# Altium PCB LCRBoard.PcbDoc
Units mm, origin at the board's own origin, x right, y up, seen from the top; angles counter-clockwise.
Board outline 100.33 x 33.02 mm, 2 copper layers (Top Layer, Bottom Layer); 32 components, 30 nets, 144 pads, 5 vias.
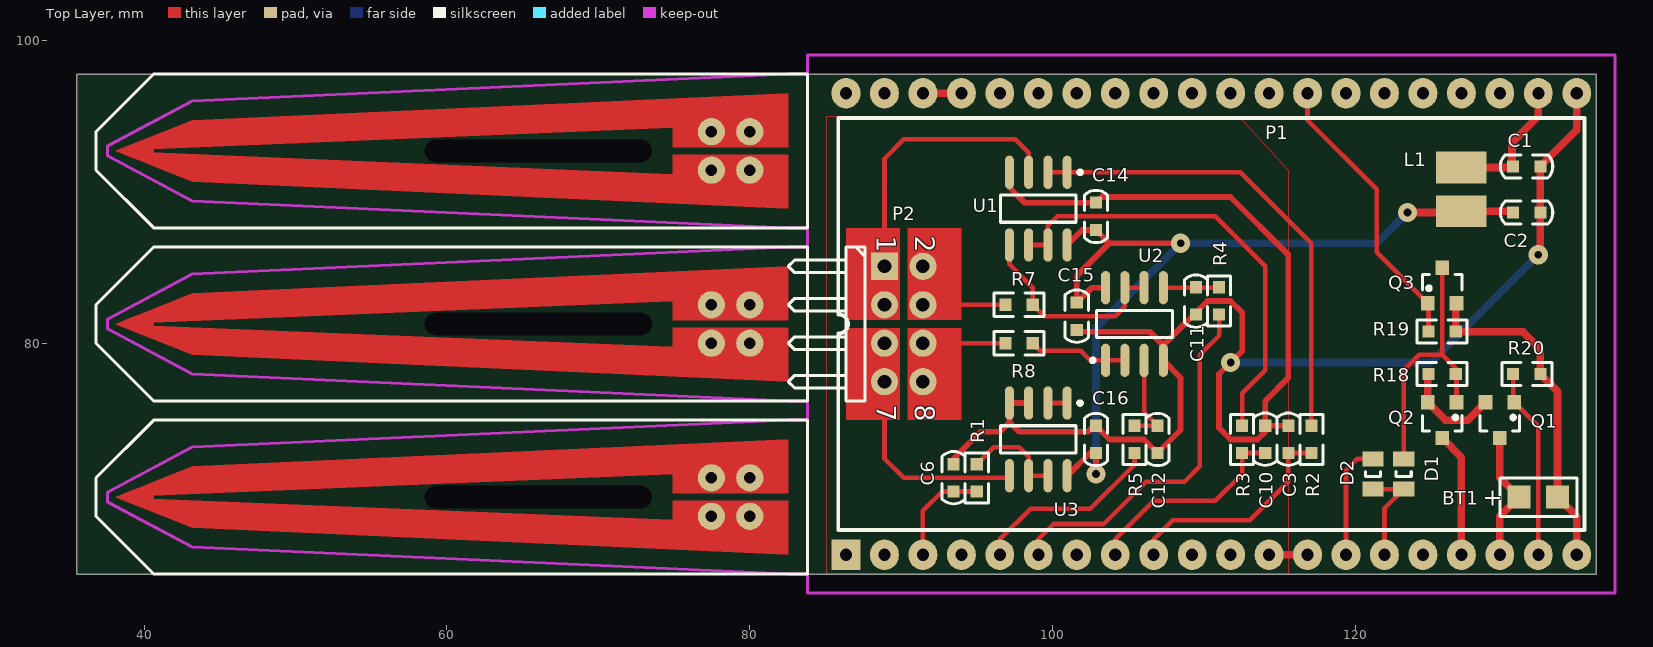
[diagram p0: Top Layer view]
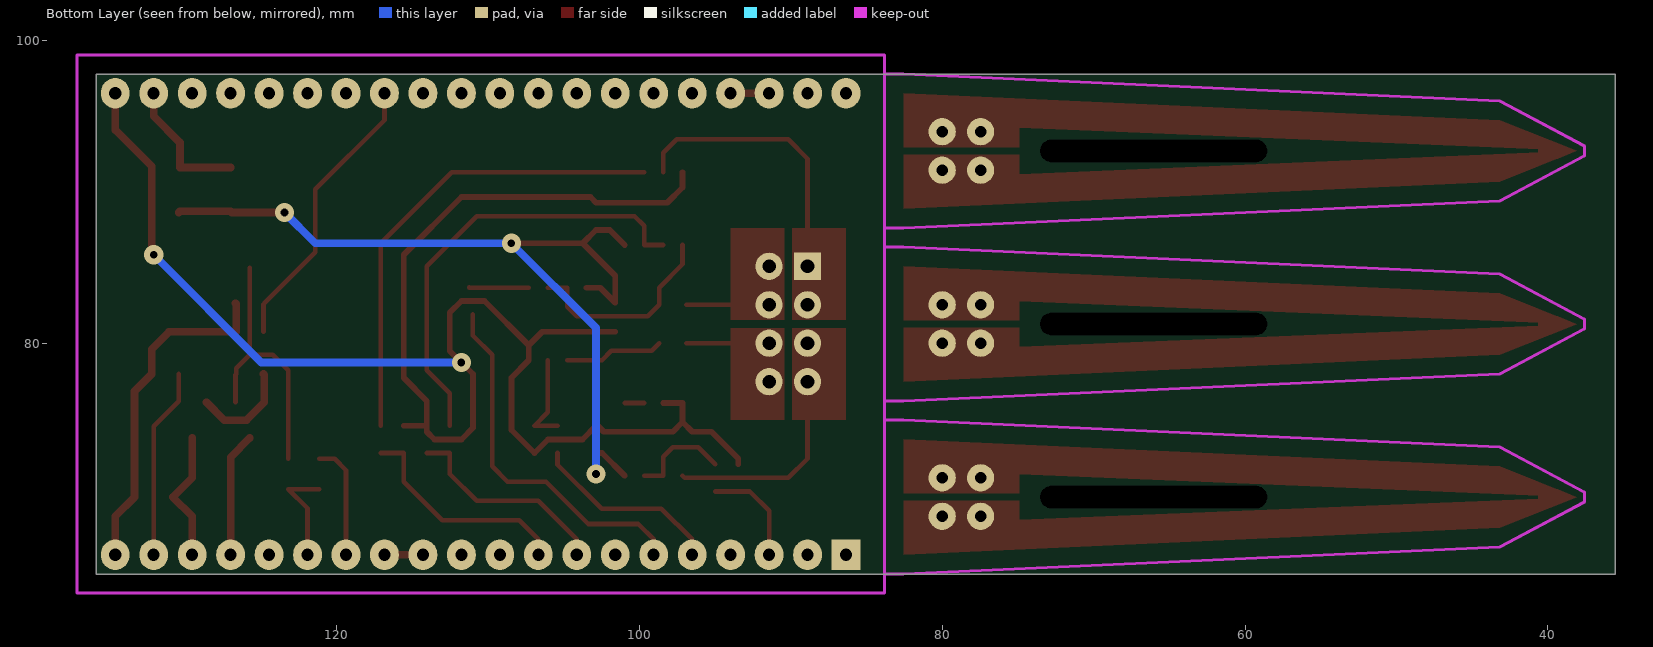
[diagram p1: Bottom Layer view, seen from below]

## Layer stack, top to bottom
Top Layer: signal copper 0.0356
Dielectric: dielectric 0.32, FR-4, Dk 4.8
Bottom Layer: signal copper 0.0356

## Board outline
35.56,64.77 135.89,64.77 135.89,97.79 35.56,97.79

## Design rules (kind name [scope] priority, off if disabled: settings)
Clearance Clearance_Polygon [InNamedPolygon('T-GND')] p1: gap=0.381
Clearance [All] p2: gap=0.254
ComponentClearance [All] p1 off: gap=0.254 collisioncheckmode=3 verticalgap=0.254 showdistances=FALSE
MinimumSolderMaskSliver [All] p1: minsoldermaskwidth=0.203
PolygonConnect PolygonConnect_Via [IsVia] p1: connectstyle=Direct reliefconductorwidth=0.254 reliefentries=4 polygonreliefangle="90 Angle"
PolygonConnect [All] p2: connectstyle=Relief reliefconductorwidth=0.254 reliefentries=4 polygonreliefangle="90 Angle"
RoutingVias [All] p1: holewidth=0.61 width=1.219 viastyle="Through Hole" minholewidth=0.305 minwidth=0.61 maxholewidth=0.457 maxwidth=0.914
SilkscreenOverComponentPads [All] p1: minsilkscreentomaskgap=0.203
SolderMaskExpansion [All] p1: expansion=0.102
Width [All] p1: maxlimit=1.016 minlimit=0.203 preferedwidth=0.305
25 further rules are at their usual default settings.

## Classes and differential pairs
component class LCRBoard: BT1 C1 C2 C3 C6 C10 C11 C12 C14 C15 C16 L1 P1 P2 Q1 Q2 Q3 R1 R2 R3 R4 R5 R7 R8 R18 R19 R20 U1 U2 U3

## Components (designator, comment, footprint, x,y, rotation, side; value= is the part's Value field where it differs from the comment)
BT1 "Battery" BAT-2 132.08,69.85 r0 top
C1 "Cap" 0603C 131.318,91.694 r180 top
C2 "Cap" 0603C 131.318,88.646 r180 top
C3 "Cap" 0603C 115.57,73.66 r90 top
C6 "Cap" 0603C 93.472,71.12 r90 top
C10 "Cap" 0603C 114.046,73.66 r90 top
C11 "Cap" 0603C 109.474,82.804 r270 top
C12 "Cap" 0603C 106.934,73.66 r270 top
C14 "Cap" 0603C 102.87,88.392 r270 top
C15 "Cap" 0603C 101.6,81.788 r90 top
C16 "Cap" 0603C 102.87,73.66 r270 top
D1 "SS14" 0805D 123.19,71.374 r270 top
D2 "SS14" 0805D 121.158,71.374 r270 top
L1 "CD32" CD32 127,90.17 r270 top
P1 "MiCore" MICORE 86.36,66.04 r90 top locked
P2 "Header 4X2H" HDR2X4H 88.9,85.09 r270 top locked
Q1 "AO3401" SOT-23 129.54,74.93 r180 top
Q2 "AO3401" SOT-23 125.73,74.93 r180 top
Q3 "AO3400" SOT-23 125.73,83.82 r0 top
R1 "Res3" 0603R 94.996,71.12 r90 top
R2 "Res3" 0603R 117.094,73.66 r90 top
R3 "Res3" 0603R 112.522,73.66 r90 top
R4 "Res3" 0603R 110.998,82.804 r90 top
R5 "Res3" 0603R 105.41,73.66 r90 top
R7 "Res3" 0603R 97.79,82.55 r180 top
R8 "Res3" 0603R 97.79,80.01 r180 top
R18 "Res3" 0603R 125.73,77.978 r180 top
R19 "Res3" 0603R 125.73,80.772 r180 top
R20 "Res3" 0603R 131.318,77.978 r180 top
U1 "MCP6002-I/SN" SOIC-SN8_N 99.06,88.9 r270 top
U2 "MCP6002-I/SN" SOIC-SN8_N 105.41,81.28 r90 top
U3 "MCP6002-I/SN" SOIC-SN8_N 99.06,73.66 r270 top

## Footprints (in the part's own frame and the unit in brackets; to place one, negate y for a bottom-side part, rotate by r counter-clockwise, add the part's x,y. Pads: shape width x height; smd on the part's side, far side on the other; paste and mask are expansions set on the pad)
0603C [mm] "ÌùÆ¬µ"
  rect 0.8x0.8 smd: 1(-0.9,0) 2(0.9,0)
  silkscreen extent -1.72,-0.76 1.74,0.76, body extent -0.9,-0.4 0.9,0.4, height 0.8
0603R [mm] "ÌùÆ¬µ"
  rect 0.8x0.8 smd: 1(-0.9,0) 2(0.9,0)
  silkscreen extent -1.65,-0.76 1.65,0.76, body extent -0.9,-0.4 0.9,0.4, height 0.45
0805D [mm] "贴片二极管(SOD-"
  rect 1x1.4 smd: 1(-1,0) 2(1,0)
  silkscreen extent -0.18,-0.5 0.15,0.5, body extent -1.07,-0.7 1.07,0.7, height 1
BAT-2 [mm] "Battery; 2 Leads"
  rect 1.5x1.5 smd: 1(-1.27,0) 2(1.27,0)
  silkscreen extent -2.54,-1.27 2.54,1.27
CD32 [mm] "Precision Wire Wound Inductor, 2-Leads, Body 3.5x3.0mm, IPC Medium Density"
  rect 2.1x3.35 smd: 1(-1.45,0) 2(1.45,0)
  body extent -1.75,-1.5 1.75,1.5, height 2.4
HDR2X4H [mm] "Connector; Header; 4x2 Position; Right Angle"
  rect 1.8x1.8 hole 0.9: 1(0,0)
  round 1.8 hole 0.9: 2(0,2.54) 3(2.54,0) 4(2.54,2.54) 5(5.08,0) 6(5.08,2.54) 7(7.62,0) 8(7.62,2.54)
  silkscreen extent -1.27,-6.35 8.89,-1.27
MICORE [mm] "MiCoreºËÐ"
  rect 2x1.9 hole 0.8: 1(0,0)
  oval 2x1.9 hole 0.8: 2(0,-2.54) 3(0,-5.08) 4(0,-7.62) 5(0,-10.16) 6(0,-12.7) 7(0,-15.24) 8(0,-17.78) 9(0,-20.32) 10(0,-22.86) 11(0,-25.4) 12(0,-27.94) 13(0,-30.48) 14(0,-33.02) 15(0,-35.56) 16(0,-38.1) 17(0,-40.64) 18(0,-43.18) 19(0,-45.72) 20(0,-48.26) 21(30.48,-48.26) 22(30.48,-45.72) 23(30.48,-43.18) 24(30.48,-40.64) 25(30.48,-38.1) 26(30.48,-35.56) 27(30.48,-33.02) 28(30.48,-30.48) 29(30.48,-27.94) 30(30.48,-25.4) 31(30.48,-22.86) 32(30.48,-20.32) 33(30.48,-17.78) 34(30.48,-15.24) 35(30.48,-12.7) 36(30.48,-10.16) 37(30.48,-7.62) 38(30.48,-5.08) 39(30.48,-2.54) 40(30.48,0)
  silkscreen extent 1.64,-48.77 28.84,0.51, body extent -1.27,-50.22 31.75,1.27, height 14.05
SOIC-SN8_N [mm] "SOIC, 8-Leads, Body 4.9x3.8mm, Pitch 1.27mm, IPC Medium Density"
  oval 2.2x0.6 smd: 1(-2.4,1.905) 2(-2.4,0.635) 3(-2.4,-0.635) 4(-2.4,-1.905) 5(2.4,-1.905) 6(2.4,-0.635) 7(2.4,0.635) 8(2.4,1.905)
  silkscreen extent -2.52,-2.5 0.9,2.88, body extent -2,-2.5 2,2.5, height 1.75
SOT-23 [mm] "SOT-23"
  rect 0.9x0.95 smd: 1(-0.95,-1.175) 2(0.95,-1.175) 3(0,1.175)
  silkscreen extent -1.3,-0.3 1.3,0.73, body extent -1.3,-0.72 1.23,0.73, height 1.1

## Part data
BT1: "Multicell Battery"
C1 C2 C3 C6 C10 C11 C12 C14 C15 C16: "Capacitor"
D1 D2: library part Diode, "Default Diode"
L1: library part "Inductor Iron", "Magnetic-Core Inductor"
P1: "MiCore核心板"
P2: "Header, 4-Pin, Dual row, Right Angle"
Q1 Q2: library part MOSFET-P, "P-Channel MOSFET"
Q3: library part MOSFET-N, "N-Channel MOSFET"
R1 R2 R3 R4 R5 R7 R8 R18 R19 R20: "Resistor"
U1 U2 U3: "1 MHz, Low-Power Operational Amplifier, 8-Pin SOIC, Industrial Temperature"

## Free pads (board coordinates)
  round 1.8 hole 0.762: 0(77.47,68.58) 0(77.47,80.01) 0(77.47,91.44) 1(77.47,71.12) 1(77.47,82.55) 1(77.47,93.98) 2(80.01,71.12) 2(80.01,82.55) 2(80.01,93.98) 3(80.01,68.58) 3(80.01,80.01) 3(80.01,91.44)
  round 1 hole 1.5 slot 15 at 0 deg: 4(66.04,69.85) 4(66.04,81.28) 4(66.04,92.71)

## Via types
v1: diameter 1.27, hole 0.508, Top Layer to Bottom Layer, 5 vias

## Nets (pads, with @x,y where several pads share a name; then routed paths per layer and width w, separated by ;. In a path a pad name is that pad's centre, name@x,y a point inside that pad or via, vN(x,y) a via of type N, cw(c..) or ccw(c..) an arc to the next point about the centre after c; other vN are vias at no path point)
ADC1: C3.1 P1.9 R2.1 | length 14.9
  Top Layer w0.305: P1.9 106.68,67.056 107.95,68.326 113.03,68.326 115.57,70.866 C3.1 R2.1
ADC2: C10.1 P1.8 R3.1 | length 14.1
  Top Layer w0.305: P1.8 104.14,67.056 106.68,69.596 110.744,69.596 112.522,71.374 R3.1 C10.1
ADC3: C6.1 P1.3 R1.1 | length 7
  Top Layer w0.305: P1.3 91.44,68.95 92.71,70.22 C6.1 R1.1
AVCC: C2.2 C14.2 C15.2 C16.2 L1.2 U1.8 U2.8 U3.8 | length 59.6
  Top Layer w0.381: U3.8 102.465,72.76 C16.2 v1(102.87,71.374) ; U1.8 101.957,87.492 C14.2 103.748,86.614 101.6,84.466 C15.2 102.592,83.68 U2.8 ; 103.886,86.614 v1(108.458,86.614)
  Top Layer w0.508: v1(123.444,88.646) 126.926,88.646 L1.2 130.344,88.72 C2.2
  Bottom Layer w0.508: v1(102.87,71.374) 102.87,81.026 v1(108.458,86.614) 121.412,86.614 v1(123.444,88.646)
DAC1: P1.6 R4.1 | length 24.2
  Top Layer w0.305: P1.6 99.06,67.056 100.076,68.072 103.378,68.072 106.172,70.866 108.712,70.866 109.728,71.882 109.728,79.248 110.998,80.518 R4.1
DAC2: P1.5 R5.1 | length 12.7
  Top Layer w0.305: P1.5 96.52,67.056 98.552,69.088 102.5,69.088 105.41,71.998 R5.1
GND: BT1.2 C1.1 C2.1 C3.2 C6.2 C10.2 C11.2 C12.2 C14.1 C15.1 C16.1 P1.20 P1.21 Q3.2 R19.1 R20.1 U1.4 U2.4 U3.3 U3.4 | length 144.3
  Top Layer w0.381: C6.2 93.472,72.39 95.25,74.168 96.52,74.168 97.155,74.803 ; U1.4 97.155,90.297 98.16,89.292 C14.1 103.24,89.662 111.76,89.662 115.57,85.852 115.57,77.724 114.046,76.2 C10.2 ; U3.3 U3.4 97.155,74.803 ; C15.1@101.6,80.772 106.426,80.772 U2.4@107.315,79.883 ; C3.2 C10.2 ; 97.155,74.803 97.79,74.168 102.362,74.168 102.754,74.56 C16.1 103.77,73.66 106.034,73.66 C12.2 108.458,74.284 108.458,77.737 U2.4 U2.4@107.315,79.883 ; U2.4@107.315,79.883 110.236,82.804 111.76,82.804 112.522,82.042 112.522,79.502 v1(111.76,78.74) 110.998,77.978 110.998,74.422 111.76,73.66 113.538,73.66 114.046,74.168 C10.2
  Top Layer w0.508: Q3.2 126.63,82.595 R19.1 131.064,80.772 132.218,79.618 R20.1 133.35,76.846 BT1.2 134.62,68.58 P1.20 ; v1(132.08,85.852) 132.218,85.99 C2.1 C1.1 134.62,94.096 P1.21
  Bottom Layer w0.508: v1(111.76,78.74) 124.968,78.74 v1(132.08,85.852)
KEY_PWR: D1.2 D2.2 P1.15 | length 6.9
  Top Layer w0.305: D2.2 D1.2 121.92,69.104 P1.15
NetC11_1: C11.1 R4.2 U2.5 | length 3.9
  Top Layer w0.305: U2.5 111.228,83.68 R4.2@111.252,83.704
NetC12_1: C12.1 R5.2 U2.3 | length 6.2
  Top Layer w0.305: R5.2 C12.1 106.045,75.449 U2.3
NetD1_1: D1.1 Q2.1 Q3.3 R18.1 | length 18.1
  Top Layer w0.305: D1.1 123.19,78.232 124.206,79.248 125.73,79.248 ; Q3.3 125.73,79.248 ; Q2.1 126.68,77.928 R18.1 126.63,78.348 125.73,79.248
NetP1_12: P1.12 P1.13 | length 2.5
  Top Layer w0.508: P1.12 P1.13
NetP1_37: P1.37 P1.38 | length 2.5
  Top Layer w0.508: P1.38 P1.37
NetP2_1: P2.1 P2.3 U1.3 | length 18.8
  Top Layer w0.305: P2.1 88.9,92.202 90.17,93.472 97.536,93.472 98.425,92.583 U1.3
NetP2_2: P2.2 P2.4 R7.2 | length 5.4
  Top Layer w0.305: P2.4 R7.2
NetP2_5: P2.5 P2.7 U3.5 | length 13.9
  Top Layer w0.305: P2.7 88.9,72.39 90.17,71.12 97.015,71.12 U3.5
NetP2_6: P2.6 P2.8 R8.2 | length 5.4
  Top Layer w0.305: P2.6 R8.2
NetQ1_3: Q1.2 Q2.2 R18.2 | length 6.7
  Top Layer w0.508: R18.2 124.78,77.928 Q2.2 125.955,74.93 127.415,74.93 Q1.2
NetR1_2: R1.2 U3.6 U3.7 | length 6.7
  Top Layer w0.305: R1.2 96.128,73.152 97.79,73.152 98.425,72.517 U3.6 U3.7
NetR2_2: R2.2 U1.1 U1.2 | length 31.4
  Top Layer w0.305: U1.2 U1.1 112.408,91.3 117.094,86.614 R2.2
NetR3_2: R3.2 U1.6 U1.7 | length 29.7
  Top Layer w0.305: U1.6 U1.7 99.695,87.757 100.33,88.392 110.744,88.392 114.046,85.09 114.046,78.232 112.522,76.708 R3.2
NetR7_1: R7.1 U1.5 U2.6 U2.7 | length 13.8
  Top Layer w0.305: U1.5 97.155,85.217 98.69,83.682 R7.1 99.452,81.788 104.14,81.788 104.775,82.423 U2.7 U2.6
NetR8_1: R8.1 U2.1 U2.2 | length 6.6
  Top Layer w0.305: R8.1 99.198,79.502 101.854,79.502 102.476,78.88 U2.1 U2.2
NetU3_1: U3.1 U3.2 | length 1.3
  Top Layer w0.305: U3.2 U3.1
PB2: D2.1 P1.14 | length 7.7
  Top Layer w0.305: P1.14 119.38,71.628 120.126,72.374 D2.1
PWR_CTRL: P1.28 Q3.1 R19.2 | length 19.1
  Top Layer w0.305: P1.28 116.84,94.742 121.412,90.17 121.412,86.013 Q3.1 124.83,82.595 R19.2
VBAT: BT1.1 P1.18 Q1.3 | length 8.8
  Top Layer w0.508: P1.18 129.54,68.58 BT1.1 129.54,71.12 Q1.3
VBUS: P1.19 Q1.1 R20.2 | length 12.6
  Top Layer w0.305: R20.2 130.418,76.177 Q1.1 132.08,74.515 P1.19
VCC: C1.2 L1.1 P1.22 | length 9
  Top Layer w0.508: L1.1 130.344,91.62 130.344,93.26 132.08,94.996 P1.22
VIN: P1.17 Q2.3 | length 8.2
  Top Layer w0.508: Q2.3 127,72.485 P1.17
pads on no net: P1.1 P1.2 P1.4 P1.7 P1.10 P1.11 P1.16 P1.23 P1.24 P1.25 P1.26 P1.27 P1.29 P1.30 P1.31 P1.32 P1.33 P1.34 P1.35 P1.36 P1.39 P1.40

## Polygon pours and split planes (outlines as drawn)
GND on Top Layer "T-GND" (solid, remove dead copper, shelved, pour order 2): 85.09,94.996 112.053,94.996 112.288,94.996 115.57,91.44 115.57,64.77 85.09,64.77

## Keep-outs
Keep-Out Layer:
  lines w0.2: 37.592,69.528 37.592,70.172 43.18,73.152 82.55,74.93 83.82,74.93 83.82,64.77 82.55,64.77 43.18,66.548 37.592,69.528 ; 37.592,80.958 37.592,81.602 43.18,84.582 82.55,86.36 83.82,86.36 83.82,76.2 82.55,76.2 43.18,77.978 37.592,80.958 ; 37.592,92.388 37.592,93.032 43.18,96.012 82.55,97.79 83.82,97.79 83.82,87.63 82.55,87.63 43.18,89.408 37.592,92.388 ; 83.82,63.5 137.16,63.5 137.16,99.06 83.82,99.06 83.82,63.5

## Other copper
Top Layer:
  rectangle net NetP2_1: 86.36,81.534 89.916,87.63
  rectangle net NetP2_5: 86.36,74.93 89.916,81.026
  rectangle net NetP2_6: 90.424,74.93 93.98,81.026
  rectangle net NetP2_2: 90.424,81.534 93.98,87.63
  region: 39.37,69.342 40.64,69.342 40.64,70.358 39.37,70.358 38.1,69.85
  region: 82.55,73.66 82.55,70.104 74.93,70.104 74.93,71.364 38.1,69.85 43.18,71.882
  region: 82.55,66.04 82.55,69.596 74.93,69.596 74.93,68.336 38.1,69.85 43.18,67.818
  region: 39.37,80.772 40.64,80.772 40.64,81.788 39.37,81.788 38.1,81.28
  region: 82.55,85.09 82.55,81.534 74.93,81.534 74.93,82.794 38.1,81.28 43.18,83.312
  region: 82.55,77.47 82.55,81.026 74.93,81.026 74.93,79.766 38.1,81.28 43.18,79.248
  region: 82.55,88.9 82.55,92.456 74.93,92.456 74.93,91.186 38.1,92.71 43.18,90.678
  region: 82.55,96.52 82.55,92.964 74.93,92.964 74.93,94.234 38.1,92.71 43.18,94.742
  region: 39.37,92.202 40.64,92.202 40.64,93.218 39.37,93.218 38.1,92.71
  pour cut-out: 85.09,88.646 94.742,88.646 94.742,73.914 85.09,73.914

## Silkscreen, mask and mechanical layers (free items; w line width, h text height)
Top Overlay:
  lines w0.2: 36.83,68.58 40.64,64.77 83.82,64.77 83.82,74.93 40.64,74.93 36.83,71.12 36.83,68.58 ; 36.83,80.01 40.64,76.2 83.82,76.2 83.82,86.36 40.64,86.36 36.83,82.55 36.83,80.01 ; 36.83,91.44 36.83,93.98 40.64,97.79 83.82,97.79 83.82,87.63 40.64,87.63 36.83,91.44

## Dimensions
35.56,64.516 to 135.89,64.77 on Mechanical 13

## Text inside footprints (layer, text, board x,y; h text height)
BT1: Top Overlay "+" at 128.41,69.273 h1.15
P2: Top Overlay "8" at 90.932,75.946 h1.27 r270; Top Overlay "7" at 88.392,75.946 h1.27 r270; Top Overlay "1" at 88.392,87.122 h1.27 r270; Top Overlay "2" at 90.932,87.122 h1.27 r270